# EAGLE board vehicle-interface (EAGLE 6.6.0)
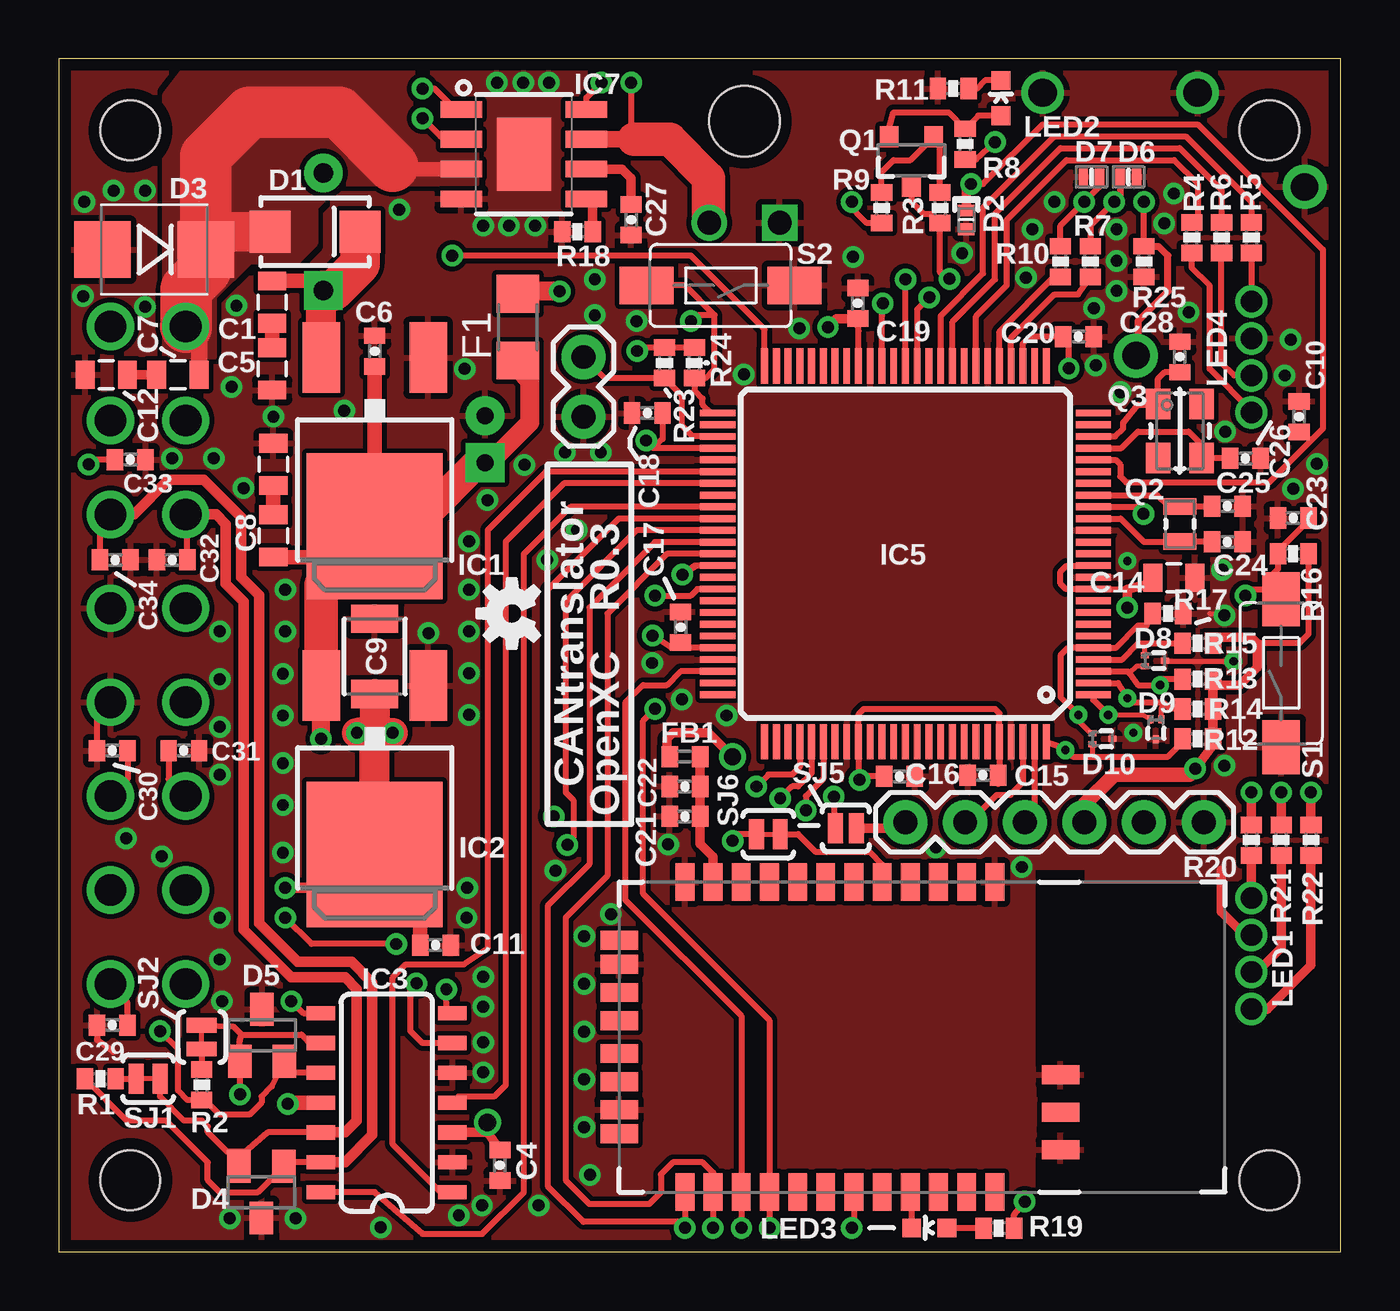
[diagram p0: board, top side]
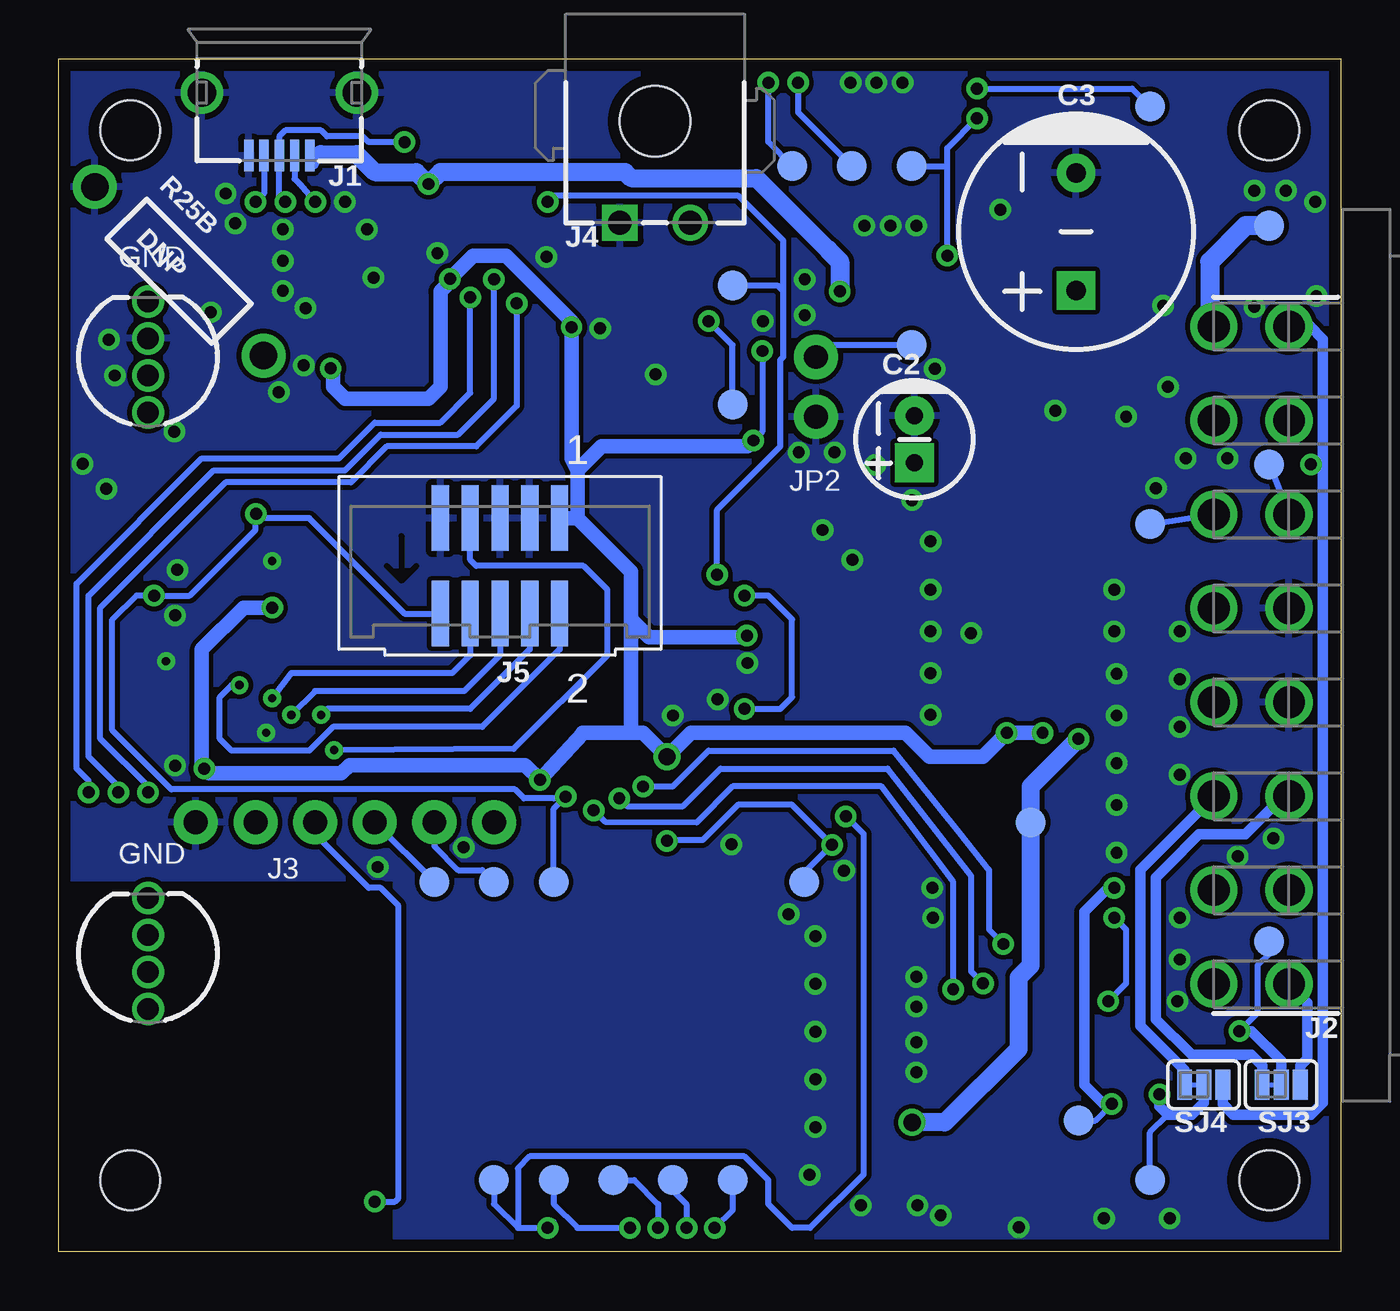
[diagram p1: board, bottom side, seen from below]

Size 54.61 x 50.8 mm. Coordinates in mm from the lower left corner, seen from the top.
Outline: 0,0 54.61,0 54.61,50.8 0,50.8 0,0
Copper layers (1*16): Top 0.0178mm / dielectric 59mil / Bottom 0.0178mm
Design rules "default": minimum track width 8mil, minimum drill 14mil, track to track 8mil, track to pad 8mil, pad to pad 8mil, via to via 8mil, smd to smd 8mil, copper to edge 20mil, drill to drill 16mil, minimum pad ring 8mil, minimum via ring 8mil, stop-mask expansion 3mil, vias tented up to drill 0mil, thermal gap 10mil
Holes 2.54 mm at 51.56,47.75 3.05,47.75 51.56,3.05 3.05,3.05
tRestrict: area 43.7,0.3 to 54.1,14.2; area 43.7,14.2 to 52.1,15.7; area 41.6,8.1 to 43.7,16.3; area 41.7,6.6 to 43.7,6.9; area 41.7,5.1 to 43.7,5.3; area 41.6,0.8 to 43.7,3.7
bRestrict: area 40.4,0.5 to 54.1,15.7; 3 lines

## Footprints (pad centres in the part's own frame; a part is rotated, then mirrored left to right if it is on the bottom)
0805 = smd 0.8 x 1.2: 1 -0.9,0; 2 0.9,0
CPOL-5MMX2D = drill 0.737 pad 1.651 square: 1 -1,0 | drill 0.737 pad 1.651: 2 1,0
CPOL-10MMX5D = drill 0.838 pad 1.651: 1 2.5,0 | drill 0.838 pad 1.651 square: 2 -2.5,0
0402-CAP = smd 0.7 x 0.9: 1 -0.65,0; 2 0.65,0
1210 = smd 1.2 x 2: 1 -1.6,0; 2 1.6,0
SMA-DIODE = smd 1.75 x 1.8: A -1.91,0; C 1.91,0
SOD-882D = smd 0.5 x 0.7: 1 -0.4,0; 2 0.4,0
SMB-DIODE = smd 2.4 x 2.4: A 2.2,0; C -2.2,0
SOT23 = smd 1 x 1.4: 1 -0.95,-1.1; 2 0.95,-1.1; 3 0,1.1
SOD-882 = smd 0.4 x 0.7: 1 -0.35,0; 2 0.35,0
SOT-1123 = smd 0.34 x 0.26: 1 -0.43,0.233; 2 -0.43,-0.233; 3 0.43,0
R1206 = smd 1.6 x 1.803: 1 -1.422,0; 2 1.422,0
C0402 = smd 0.7 x 0.9: 1 -0.65,0; 2 0.65,0
V-REG_DPACK = smd 1.6 x 3: 1 -2.28,-4.8; 3 2.28,-4.8 | smd 5.8 x 6.2: 4 0,2.38
SO14 = smd 0.6 x 1.2: 1 -3.81,-2.8; 2 -2.54,-2.8; 3 -1.27,-2.8; 4 0,-2.8; 5 1.27,-2.8; 6 2.54,-2.8; 7 3.81,-2.8; 8 3.81,2.8; 9 2.54,2.8; 10 1.27,2.8; 11 0,2.8; 12 -1.27,2.8; 13 -2.54,2.8; 14 -3.81,2.8
TQFP100 = smd 1.5 x 0.29: 1 -8,6; 2 -8,5.5; 3 -8,5; 4 -8,4.5; 5 -8,4; 6 -8,3.5; 7 -8,3; 8 -8,2.5; 9 -8,2; 10 -8,1.5; 11 -8,1; 12 -8,0.5; 13 -8,0; 14 -8,-0.5; 15 -8,-1; 16 -8,-1.5; 17 -8,-2; 18 -8,-2.5; 19 -8,-3; 20 -8,-3.5; 21 -8,-4; 22 -8,-4.5; 23 -8,-5; 24 -8,-5.5; 25 -8,-6; 51 8,-6; 52 8,-5.5; 53 8,-5; 54 8,-4.5; 55 8,-4; 56 8,-3.5; 57 8,-3; 58 8,-2.5; 59 8,-2; 60 8,-1.5; 61 8,-1; 62 8,-0.5; 63 8,0; 64 8,0.5; 65 8,1; 66 8,1.5; 67 8,2; 68 8,2.5; 69 8,3; 70 8,3.5; 71 8,4; 72 8,4.5; 73 8,5; 74 8,5.5; 75 8,6 | smd 0.29 x 1.5: 26 -6,-8; 27 -5.5,-8; 28 -5,-8; 29 -4.5,-8; 30 -4,-8; 31 -3.5,-8; 32 -3,-8; 33 -2.5,-8; 34 -2,-8; 35 -1.5,-8; 36 -1,-8; 37 -0.5,-8; 38 0,-8; 39 0.5,-8; 40 1,-8; 41 1.5,-8; 42 2,-8; 43 2.5,-8; 44 3,-8; 45 3.5,-8; 46 4,-8; 47 4.5,-8; 48 5,-8; 49 5.5,-8; 50 6,-8; 76 6,8; 77 5.5,8; 78 5,8; 79 4.5,8; 80 4,8; 81 3.5,8; 82 3,8; 83 2.5,8; 84 2,8; 85 1.5,8; 86 1,8; 87 0.5,8; 88 0,8; 89 -0.5,8; 90 -1,8; 91 -1.5,8; 92 -2,8; 93 -2.5,8; 94 -3,8; 95 -3.5,8; 96 -4,8; 97 -4.5,8; 98 -5,8; 99 -5.5,8; 100 -6,8
RN41 = smd 0.8 x 1.6: 1 -6.6,-6.6; 2 -5.4,-6.6; 3 -4.2,-6.6; 4 -3,-6.6; 5 -1.8,-6.6; 6 -0.6,-6.6; 7 0.6,-6.6; 8 1.8,-6.6; 9 3,-6.6; 10 4.2,-6.6; 11 5.4,-6.6; 12 6.6,-6.6; 13 6.6,6.6; 14 5.4,6.6; 15 4.2,6.6; 16 3,6.6; 17 1.8,6.6; 18 0.6,6.6; 19 -0.6,6.6; 20 -1.8,6.6; 21 -3,6.6; 22 -4.2,6.6; 23 -5.4,6.6; 24 -6.6,6.6 | smd 1.6 x 0.8: 25 -9.4,4.8; 26 -9.4,3.2; 27 -9.4,1.6; 28 9.4,3.1; 29 9.4,-3.1; 30 9.4,-4.122; 31 9.4,-1.9; 32 9.4,-0.7; 33 9.4,0.7; 34 9.4,1.9; 35 9.4,4.122
POWER_SO8 = smd 0.711 x 1.778: 1 -1.905,-2.662; 2 -0.635,-2.662; 3 0.635,-2.662; 4 1.905,-2.662; 5 1.905,2.662; 6 0.635,2.662; 7 -0.635,2.662; 8 -1.905,2.662 | smd 3.1 x 2.3: PAD 0,0
10118193 = smd 0.4 x 1.35: 1 -1.3,2.675; 2 -0.65,2.675; 3 0,2.675; 4 0.65,2.675; 5 1.3,2.675 | drill 1.2: S1 -3.3,0; S2 3.3,0
OBDII-COMTECH = drill 1.346: 1 -14,0; 2 -10,0; 3 -6,0; 4 -2,0; 5 2,0; 6 6,0; 7 10,0; 8 14,0; 9 -14,3.2; 10 -10,3.2; 11 -6,3.2; 12 -2,3.2; 13 2,3.2; 14 6,3.2; 15 10,3.2; 16 14,3.2
1X06 = drill 1.016 pad 1.88: 1 0,0; 2 2.54,0; 3 5.08,0; 4 7.62,0; 5 10.16,0; 6 12.7,0
2-1445055-2 = drill 1.016 square: 1 1.499,2.159 | drill 1.016: 2 -1.499,2.159 | hole 2.997: 0,-2.159
SHF-105-01-X-D-SM = smd 0.737 x 2.794: 1 -2.54,-2.032; 2 -2.54,2.032; 3 -1.27,-2.032; 4 -1.27,2.032; 5 0,-2.032; 6 0,2.032; 7 1.27,-2.032; 8 1.27,2.032; 9 2.54,-2.032; 10 2.54,2.032
1X02 = drill 1.016 pad 1.88: 1 0,0; 2 2.54,0
LED5MM-RGB = drill 0.914 pad 1.346: 1 2.362,0; 2 0.787,0; 3 -0.787,0; 4 -2.362,0
LED-0603 = smd 0.8 x 0.8: A 0,-0.75; C 0,0.75
SOT23-3 = smd 0.8 x 0.9: 1 -0.95,-1; 2 0.95,-1; 3 0,1.1
ST2012SB = smd 0.7 x 1.4: 1 -0.75,0; 2 0.75,0
CX3225SB = smd 1.3 x 1.05: 1 -1.15,-0.925; 2 1.15,-0.925; 3 1.15,0.925; 4 -1.15,0.925
0402-RES = smd 0.7 x 0.9: 1 -0.65,0; 2 0.65,0
AXIAL-0.4 = drill 1.168 pad 1.88: P$1 -5.08,0; P$2 5.08,0
TACTILE-SWITCH-1101NE = smd 2.3 x 1.6: P$1 -3.15,0; P$2 3.15,0
SJ_2S-TRACE = smd 0.635 x 1.27: 1 -0.508,0; 2 0.508,0
SJ_3_PASTE1&2 = smd 0.635 x 1.27: 1 -0.813,0; 2 0,0; 3 0.813,0
SJ_2S-NO = smd 0.635 x 1.27: 1 -0.45,0; 2 0.45,0
PAD.03X.05 = smd 1.27 x 1.27: P$1 0,0

## Placement (x,y rotation side)
C1  0.1u  [0805]  9.09,40.44 270 top
C2  150u  [CPOL-5MMX2D]  18.16,34.59 90 bottom
C3  270u  [CPOL-10MMX5D]  11.28,43.43 90 bottom
C4  22n  [0402-CAP]  18.8,3.68 270 top
C5  0.1u  [0805]  9.09,37.59 270 top
C6  0.1u  [0402-CAP]  13.46,38.35 270 top
C7  0.47u  [0805]  5.08,37.34 180 top
C8  0.1u  [0805]  9.14,30.48 90 top
C9  47u  [1210]  13.46,25.35 90 top
C10  0.1u  [0402-CAP]  52.83,35.56 90 top
C11  22n  [0402-CAP]  16.05,13.06 0 top
C12  0.47u  [0805]  2.03,37.34 180 top
C13  0.1u  [0805]  9.14,33.53 90 top
C14  10u  [0805]  47.5,28.7 0 top
C15  0.1u  [0402-CAP]  39.37,20.29 180 top
C16  0.1u  [0402-CAP]  35.81,20.24 0 top
C17  0.1u  [0402-CAP]  26.49,26.59 90 top
C18  0.1u  [0402-CAP]  25.07,35.71 180 top
C19  0.1u  [0402-CAP]  34.04,40.39 90 top
C20  0.1u  [0402-CAP]  43.43,38.96 0 top
C21  0.1u  [0402-CAP]  26.67,18.54 0 top
C22  1u  [0402-CAP]  26.67,19.81 0 top
C23  0.1u  [0402-CAP]  52.58,31.24 180 top
C24  18p  [0402-CAP]  49.78,30.23 180 top
C25  18p  [0402-CAP]  49.78,31.75 180 top
C26  18p  [0402-CAP]  50.55,33.78 0 top
C27  1u  [0402-CAP]  24.38,43.94 270 top
C28  18p  [0402-CAP]  47.75,38.1 90 top
C29  100p  [0402-CAP]  2.29,9.65 180 top
C30  100p  [0402-CAP]  2.29,21.34 180 top
C31  100p  [0402-CAP]  5.33,21.34 0 top
C32  100p  [0402-CAP]  4.83,29.46 180 top
C33  100p  [0402-CAP]  3.05,33.73 0 top
C34  100p  [0402-CAP]  2.41,29.46 0 top
D1  RS1J  [SMA-DIODE]  10.92,43.43 0 top
D2  PESD12VS1ULD  [SOD-882D]  38.66,43.94 270 top
D3  1SMB16CAT3G  [SMB-DIODE]  4.06,42.67 180 top
D4  PESD1CAN  [SOT23]  8.64,2.54 180 top
D5  PESD1CAN  [SOT23]  8.66,9.22 0 top
D6  PESD5V0X1BL  [SOD-882]  45.57,45.77 180 top
D7  PESD5V0X1BL  [SOD-882]  43.99,45.77 0 top
D8  [SOT-1123]  46.69,25.17 0 top
D9  [SOT-1123]  46.74,22.25 270 top
D10  [SOT-1123]  44.45,21.84 0 top
DRILEGEND  [DRILEGEND]  119.63,27.56 0 top  (outside the outline)
F1  MF-MSMF110/16-2  [R1206]  19.56,39.37 90 top
F2  [OSHW-LOGO-S]  19.3,27.18 90 top
FB1  742843122  [C0402]  26.67,21.08 180 top
IC1  LM340S-50  [V-REG_DPACK]  13.46,33.27 180 top
IC2  TLE4284DV33  [V-REG_DPACK]  13.46,19.3 180 top
IC3  TJA1048T  [SO14]  13.97,6.35 90 top
IC5  LPC1769FBD100  [TQFP100]  36.07,29.72 180 top
IC6  RN41-I/RM  [RN41]  33.27,9.14 180 top
IC7  TPS2421-2  [POWER_SO8]  19.81,46.74 270 top
J1  USB_MINIB_SHIELD-10118193  [10118193]  45.21,49.35 180 bottom
J2  OBDII  [OBDII-COMTECH]  2.21,25.4 90 bottom
J3  ISP  [1X06]  36.07,18.29 0 top
J4  PWR OUT  [2-1445055-2]  29.21,45.97 180 bottom
J5  ARM mini-JTAG  [SHF-105-01-X-D-SM]  35.81,29.21 180 bottom
JP2  ISP_EN  [1X02]  22.35,38.1 270 top
LED1  RGB  [LED5MM-RGB]  50.8,12.7 90 bottom
LED2  SML-LX0603SRW  [LED-0603]  40.13,49.12 0 top
LED3  SML-LX0603SRW  [LED-0603]  37.08,1.02 90 top
LED4  RGB  [LED5MM-RGB]  50.8,38.1 90 bottom
Q1  BC856  [SOT23-3]  36.32,46.48 180 top
Q2  32k  [ST2012SB]  47.75,30.99 270 top
Q3  12M  [CX3225SB]  47.75,34.95 270 top
R1  120  [0402-RES]  1.78,7.37 0 top
R2  120  [0402-RES]  6.1,7.11 270 top
R3  10k  [0402-RES]  37.54,44.45 270 top
R4  17.4  [0402-RES]  48.26,43.18 270 top
R5  143  [0402-RES]  50.8,43.18 270 top
R6  30  [0402-RES]  49.53,43.18 270 top
R7  33E  [0402-RES]  43.94,42.16 90 top
R8  1.5k  [0402-RES]  38.61,47.17 90 top
R9  2k  [0402-RES]  35.05,44.45 270 top
R10  33E  [0402-RES]  42.67,42.16 90 top
R11  560  [0402-RES]  38.1,49.53 0 top
R12  10k  [0402-RES]  48.51,21.84 180 top
R13  10k  [0402-RES]  48.51,24.38 180 top
R14  10k  [0402-RES]  48.51,23.11 180 top
R15  4.7k  [0402-RES]  48.51,25.91 180 top
R16  10k  [0402-RES]  52.58,29.72 0 top
R17  10k  [0402-RES]  47.24,27.18 0 top
R18  49.9k  [0402-RES]  22.1,43.43 180 top
R19  560  [0402-RES]  40.05,1.01 180 top
R20  143  [0402-RES]  50.8,17.53 270 top
R21  30  [0402-RES]  52.07,17.53 270 top
R22  17.4  [0402-RES]  53.34,17.53 270 top
R23  10k  [0402-RES]  25.81,37.85 270 top
R24  10k  [0402-RES]  27.08,37.85 270 top
R25  120  [0402-RES]  46.23,42.16 90 top
R25B  DNP  [AXIAL-0.4]  49.48,41.75 315 bottom
S1  RESET  [TACTILE-SWITCH-1101NE]  52.07,24.64 90 top
S2  PROG  [TACTILE-SWITCH-1101NE]  28.19,41.15 180 top
SJ1  CLOSED  [SJ_2S-TRACE]  3.81,7.37 180 top
SJ2  CLOSED  [SJ_2S-TRACE]  6.1,9.14 90 top
SJ3  [SJ_3_PASTE1&2]  2.54,7.11 0 bottom
SJ4  [SJ_3_PASTE1&2]  5.84,7.11 0 bottom
SJ5  OPEN  [SJ_2S-NO]  33.53,18.03 0 top
SJ6  CLOSED  [SJ_2S-TRACE]  30.23,17.78 0 top
TP1  [PAD.03X.05]  3.05,33.53 0 bottom
TP2  [PAD.03X.05]  8.13,30.99 0 bottom
TP3  [PAD.03X.05]  3.05,13.21 0 bottom
TP4  [PAD.03X.05]  8.13,3.05 0 bottom
TP5  [PAD.03X.05]  3.05,43.69 0 bottom
TP6  [PAD.03X.05]  13.21,18.29 0 bottom
TP7  [PAD.03X.05]  11.18,5.59 0 bottom
TP8  [PAD.03X.05]  25.91,3.05 90 bottom
TP9  [PAD.03X.05]  28.45,3.05 90 bottom
TP10  [PAD.03X.05]  30.99,3.05 90 bottom
TP11  [PAD.03X.05]  33.53,3.05 90 bottom
TP12  [PAD.03X.05]  22.86,15.75 90 bottom
TP13  [PAD.03X.05]  36.07,3.05 90 bottom
TP14  [PAD.03X.05]  18.29,46.23 0 bottom
TP15  [PAD.03X.05]  23.37,46.23 0 bottom
TP16  [PAD.03X.05]  25.91,41.15 0 bottom
TP17  [PAD.03X.05]  18.29,38.61 0 bottom
TP18  [PAD.03X.05]  25.91,36.07 0 bottom
TP19  [PAD.03X.05]  36.07,15.75 90 bottom
TP20  [PAD.03X.05]  38.61,15.75 90 bottom
TP21  [PAD.03X.05]  33.53,15.75 0 bottom
TP22  [PAD.03X.05]  8.13,48.77 0 bottom
TP23  [PAD.03X.05]  20.83,46.23 0 bottom
ZDRAW1  [A4L-LOC]  -55.88,-52.7 0 top  (outside the outline)

## Library data of the parts
C1-C34 D1-D10 FB1 IC3 IC5 IC7 J1 J2 J4 J5 LED1-LED4 Q2 Q3 R1-R25 R25B = BUG
DRILEGEND = drilegend
F1 = adafruit
F2 = SparkFun-Aesthetics
IC1 IC2 = SparkFun-PowerIC
IC6 = SparkFun-RF
J3 JP2 = SparkFun-Connectors
Q1 = SparkFun-DiscreteSemi
S1 S2 = SparkFun-Electromechanical
SJ1-SJ6 TP1-TP23 = SparkFun-Passives
ZDRAW1 = frames

## Nets
3.3V: C9.1 C11.1 C14.1 C15.1 C16.1 C17.1 C18.1 C19.1 C20.1 FB1.2 IC2.4 IC3.11 IC5.10 IC5.12 IC5.28 IC5.42 IC5.54 IC5.71 IC5.84 IC5.96 J3.4 J5.1 Q1.3 R3.2 R12.1 R13.1 R14.1 R15.1 R16.2 R19.1 R23.1 R24.1 TP7.P$1
5V: C2.1 C4.1 C6.2 C8.1 F1.1 IC1.4 IC2.3 IC3.3 TP6.P$1
!BT_RST: IC5.61 SJ6.1 TP12.P$1
!ISP_EN: IC5.53 JP2.1 R23.2 TP17.P$1
!RESET: C23.1 IC5.17 J5.10 R16.1 S1.P$2 SJ5.1 TP21.P$1
!USBBOOT_EN: IC5.51 R24.2 S2.P$2 TP18.P$1
+12V: C7.1 D1.A D3.C IC7.3 J2.16 TP5.P$1
BT_CONN: IC5.60 IC6.19 TP13.P$1
BT_CTS: IC5.66 IC6.16 TP11.P$1
BT_RTS: IC5.73 IC6.15 TP10.P$1
BT_RX: IC5.62 IC6.13 TP8.P$1
BT_TX: IC5.63 IC6.14 TP9.P$1
CANA_EN: IC3.14 IC5.59
CANA_RX: IC3.4 IC5.57
CANA_TX: IC3.1 IC5.56
CANB_EN: IC3.8 IC5.79
CANB_RX: IC3.7 IC5.81
CANB_TX: IC3.6 IC5.80
DEBUG_RX: IC5.99 J3.3 TP20.P$1
DEBUG_TX: IC5.98 J3.2 TP19.P$1
GND: C2.2 C3.1 C4.2 C5.2 C6.1 C9.2 C10.2 C11.2 C12.2 C13.2 C14.2 C15.2 C16.2 C17.2 C18.2 C19.2 C20.2 C21.1 C22.1 C23.2 C24.1 C25.1 C26.2 C27.2 C28.2 C29.2 C30.2 C31.2 C32.2 C33.2 C34.2 D2.2 D3.A D4.3 D5.3 D6.1 D7.1 D8.3 D9.3 D10.3 IC1.1 IC2.1 IC3.2 IC3.5 IC5.11 IC5.15 IC5.31 IC5.41 IC5.55 IC5.72 IC5.83 IC5.97 IC6.1 IC6.12 IC6.25 IC6.27 IC6.28 IC6.29 IC7.4 IC7.PAD J1.5 J1.S1 J1.S2 J2.4 J2.5 J3.6 J4.1 J5.3 J5.5 J5.9 JP2.2 LED1.2 LED4.2 R11.1 R17.2 R18.2 R25.1 R25B.P$1 S1.P$1 S2.P$1
HSPD_HI: C34.1 D4.1 IC3.13 J2.6 R1.1 TP1.P$1
HSPD_LO: C32.1 D4.2 IC3.12 J2.14 SJ1.1 TP2.P$1
MSPD_HI: C30.1 D5.2 IC3.10 J2.3 R2.2 SJ3.1 SJ3.2 TP3.P$1
MSPD_LO: C31.1 D5.1 IC3.9 J2.11 SJ2.2 SJ4.1 SJ4.2 TP4.P$1
MULTI_HI: C29.1 J2.1 SJ3.3
MULTI_LO: C33.1 J2.8 SJ4.3
N$1: R1.2 SJ1.2
N$2: IC5.40 R20.1
N$3: R2.1 SJ2.1
N$4: IC5.50 IC7.2 TP14.P$1
N$5: LED1.4 R22.2
N$6: IC6.21 LED3.C
N$7: C7.2 C12.1
N$8: LED3.A R19.2
N$9: IC5.38 R21.1
N$10: IC5.37 R22.1
N$11: LED1.3 R21.2
N$12: LED1.1 R20.2
N$13: IC7.5 R18.1
N$14: C27.1 IC7.6
N$15: LED4.4 R4.2
N$16: IC5.32 R4.1
N$17: C25.2 IC5.18 Q2.1
N$18: C8.2 C13.1
N$19: J1.4 R25.2 R25B.P$2
N$20: D7.2 J1.2 R10.2
N$21: C1.2 C5.1
N$22: C1.1 C3.2 D1.C IC1.3
N$23: C24.2 IC5.16 Q2.2
N$24: D6.2 J1.3 R7.2 R8.1
N$25: C26.1 IC5.22 Q3.3
N$26: C28.1 IC5.23 Q3.1
N$27: LED2.A Q1.2 R8.2
N$28: LED2.C R11.2
N$29: Q1.1 R3.1 R9.1
N$30: LED4.3 R6.2
N$31: LED4.1 R5.2
N$32: IC5.34 R6.1
N$33: IC5.35 R5.1
N$34: IC7.1 TP22.P$1
N$35: IC7.8 TP23.P$1
N$36: J3.1 SJ5.2
N$37: IC6.5 SJ6.2
N$38: C21.2 C22.2 FB1.1 IC6.11
RTCK: D10.2 IC5.100 J5.7 R12.2
TCK: D10.1 IC5.5 J5.4 R17.1
TDI: D9.1 IC5.2 J5.8 R14.2
TDO: D9.2 IC5.1 J5.6
TMS: D8.2 IC5.3 J5.2 R13.2
TRST: D8.1 IC5.4 R15.2
USB_CON: IC5.64 R9.2 TP16.P$1
USB_D+: IC5.29 R7.1
USB_D-: IC5.30 R10.1
USB_VBUS: C10.1 D2.1 F1.2 IC5.21 J1.1
VOUT: IC7.7 J4.2 TP15.P$1

## Tracks (layer width: path | path; a pad name or v marks a point on that pad's centre or on a via)
3.3V  (via drill 0.51, 0.74)
  Top 0.254: IC5.42 34.07,39.2 C19.1 34.04,39.37 | 46.34,28.45 45.52,28.22 45.24,28.22 IC5.10 42.9,28.22 42.67,28.45 42.67,28.96 42.93,29.21 IC5.12 | 49.28,21.73 R12.1 | IC5.28 41.07,38.66 41.4,38.99 42.73,38.99 C20.1 43.02,38.61 v43.03,37.62 | 35.38,19.99 C16.1 34.11,20.24 v34.11,20.09 34.07,20.29 IC5.84 34.07,22.89 34.29,23.11 39.88,23.11 40.07,22.92 IC5.96 40.07,20.3 C15.1 40.02,19.92 | Q1.3 36.32,44.7 36.83,44.2 37.08,44.2 | 37.08,44.2 37.2,44.2 R3.2 37.54,41.71 37.82,41.43 v37.95,41.43 | 37.08,44.2 37.34,43.94 37.34,43.69 | R19.1 40.7,1.58 v41.15,2.13 | R16.2 53.23,26.3 52.83,25.91 51.05,25.91 | C17.1 26.72,25.72 IC5.71 26.1,25.72 v25.3,26.24 | R24.1 R23.1 24.78,38.5 v24.64,38.35 | IC5.54 25.34,34.22 | 25.34,34.22 v25.02,34.54 | C18.1 25.72,34.61 25.33,34.22 25.34,34.22 | IC3.11 9.8,6.35 v9.75,6.3
  Top 0.406: R12.1 R14.1 R13.1 49.42,24.13 50.29,24.13 51.05,24.89 51.05,25.91 50.8,26.16 49.42,26.16 R15.1 | C14.1 46.6,28.56 46.48,28.45 45.52,28.22 v45.52,27.43 | 49.28,21.73 49.28,21.69 49.17,21.59 v48.41,20.57 | C19.1 33.13,39.74 v32.77,39.37 | v28.7,21.08 27.69,22.1 26.16,22.1 25.91,21.84 25.91,21.19 FB1.2
  Top 0.457: v9.65,15.49 11.18,15.49 11.27,15.4 11.94,15.4
  Top 0.61: IC3.11 9.65,6.35 9.73,6.3 | J3.4 43.69,19.05 44.96,20.32 48.16,20.32 v48.41,20.57 | 11.94,15.4 IC2.4 15.4,14.98 C11.1
  Top 1.27: C9.1 13.46,22.1 | IC2.4 13.46,22.1 | 13.46,22.1 v14.22,22.1 | 13.46,22.1 v12.7,22.1
  Bottom 0.254: v41.15,2.13 40.28,2.13 40.13,2.29 40.13,14.73 40.89,15.49 41.4,15.49 43.69,17.78 J3.4 | v24.64,38.35 24.64,34.92 v25.02,34.54 | TP7.P$1 10.46,5.59 v9.75,6.3
  Bottom 0.457: v9.75,6.3 10.11,6.3 10.92,7.11 10.92,14.48 9.91,15.49 v9.65,15.49
  Bottom 0.61: J5.1 32.51,31.24 | 32.51,31.24 30.23,28.96 30.23,26.92 | 30.23,26.92 30.23,22.1 | 30.23,22.1 32.29,22.1 32.29,22.06 v34.11,20.09 34.75,20.73 42.22,20.73 42.57,20.37 48.21,20.37 v48.41,20.57 48.51,20.57 48.51,25.65 46.74,27.43 v45.52,27.43 | 32.51,31.24 32.51,33.27 | 32.51,33.27 31.5,34.29 25.27,34.29 v25.02,34.54 | 32.51,33.27 32.77,33.78 v32.77,39.37 32.77,39.62 35.56,42.42 36.96,42.42 v37.95,41.43 37.95,41.3 38.35,40.89 38.35,36.83 38.86,36.32 42.42,36.32 42.93,36.83 42.93,37.52 v43.03,37.62 | 30.23,26.92 29.46,26.16 25.38,26.16 v25.3,26.24 | 30.23,22.1 29.72,22.1 v28.7,21.08 27.69,22.1 18.54,22.1 17.53,21.08 15.24,21.08 v14.22,22.1 v12.7,22.1
5V  (via drill 0.51, 0.74)
  Top 0.406: IC3.3 18.27,5.08 C4.1 18.27,5.09 18.29,5.08 18.26,5.05 v18.26,5.51
  Top 0.61: C8.1 12.24,29.58 12.44,29.67 IC1.4 | C6.2 IC1.4 | 13.46,28.86 IC1.4
  Top 0.762: v11.18,21.84 IC2.3
  Top 0.813: F1.1 19.56,37.59 20.07,37.08 20.07,35.31 18.36,33.59 C2.1
  Top 1.27: C2.1 17.85,33.59 15.49,31.24 15.49,30.39 IC1.4
  Top 1.422: IC2.3 11.18,28.41 12.44,29.67
  Bottom 0.762: v18.26,5.51 16.87,5.51 13.72,8.64 13.72,11.68 13.21,12.19 TP6.P$1 13.21,19.81 v11.18,21.84
  Bottom 0.813: 18.09,33.53 C2.1
!BT_RST  (via drill 0.51)
  Top 0.254: IC5.61 24.62,30.72 21.59,27.69 21.59,19.56 21.92,19.23 21.92,17.63 v21.67,17.32 | SJ6.1 28.96,17.78 v28.7,17.5
  Bottom 0.254: 21.84,17.53 v21.67,17.32 | v21.67,17.32 23.39,19.05 25.65,19.05 27.18,17.53 28.7,17.53 v28.7,17.5 | 22.86,16.13 v21.67,17.32
  Bottom 0.406: 22.86,16.13 TP12.P$1
!ISP_EN
  Top 0.254: IC5.53 27,34.72 26.54,35.18 26.54,36.46 R23.2 23.26,37.2 JP2.1
  Bottom 0.254: TP17.P$1 21.84,38.61 JP2.1
!RESET  (via drill 0.51)
  Top 0.254: C23.1 53.23,31.13 51.93,29.83 R16.1 51.93,29.07 51.56,28.7 52.07,28.19 | 46.01,31.72 v46.2,31.42 45.9,31.72 IC5.17 | SJ5.1 v33.02,19.38 | v50.55,27.94 50.79,28.18 51.93,28.18 51.94,28.19 52.07,28.19 | S1.P$2 52.07,28.19
  Bottom 0.254: J5.10 39.88,27.18 43.94,31.24 45.97,31.24 v46.2,31.42 46.23,31.39 46.23,30.73 49.02,27.94 v50.55,27.94 51.31,27.94 52.32,26.92 52.32,22.2 49.81,19.68 35.18,19.68 34.8,19.3 33.53,19.3 33.2,19.38 v33.02,19.38 33.53,18.87 TP21.P$1
!USBBOOT_EN  (via drill 0.51)
  Top 0.254: IC5.51 27.78,35.72 27.43,36.07 27.43,36.32 27.08,36.68 R24.2 27.54,37.2 27.94,37.59 27.94,39.88 | 27.94,39.88 26.67,41.15 S2.P$2 | 27.94,39.88 27.18,39.88 v26.92,39.62
  Bottom 0.254: TP18.P$1 25.91,38.61 v26.92,39.62
+12V
  Top 0.61: IC7.3 14.35,46.1 14.22,46.23
  Top 0.711: C7.1 5.98,38.83 5.44,39.37
  Top 1.676: D1.A 6.52,43.43 6.26,43.18
  Top 2.184: 14.22,46.23 11.94,48.51 8.13,48.51 6.26,46.65 6.26,43.18 D3.C 6.26,41.82 5.44,41 5.44,39.37 J2.16
  Bottom 0.813: TP5.P$1 4.06,43.69 5.59,42.16 5.59,39.58 J2.16
  Bottom 1.067: 5.44,39.37 J2.16
  pour Top (rank 2, no thermals): 4.55,38.1 4.55,49.28 5.33,50.29 16.76,50.29 17.78,49.28 17.78,45.47 11.94,45.47 10.92,44.45 10.92,42.93 10.16,42.16 8.13,42.16 6.6,40.64 6.6,38.1
BT_CONN  (via drill 0.51)
  Top 0.254: IC5.60 23.85,31.22 20.83,28.19 20.83,18.8 v21.08,18.54 | IC6.19 33.87,1.11 v33.78,1.02
  Bottom 0.254: v21.08,18.54 20.32,17.78 20.32,3.3 22.61,1.02 23.37,1.02 24.38,2.03 24.38,3.05 25.4,4.06 34.54,4.06 35.05,3.56 35.05,1.02 | 33.53,1.27 v33.78,1.02 35.05,1.02 | TP13.P$1 36.07,2.03 35.05,1.02
BT_CTS  (via drill 0.51)
  Top 0.254: IC5.66 27.2,28.22 26.92,27.94 v25.4,27.94 | v25.4,23.11 24.89,22.61 24.89,15.24 30.27,9.86 IC6.16 30.27,1.22 v30.28,1.02
  Bottom 0.254: v25.4,23.11 23.88,23.11 23.37,23.62 23.37,26.92 24.38,27.94 v25.4,27.94 | TP11.P$1 33.53,2.03 32.51,1.02 v30.28,1.02
BT_RTS  (via drill 0.51)
  Top 0.254: IC5.73 26.5,24.72 25.91,24.13 24.89,24.13 24.13,23.37 24.13,14.99 29.07,10.04 IC6.15 29.07,1.13 v29.08,1.02
  Bottom 0.254: TP10.P$1 30.09,3.05 29.07,2.03 v29.07,1.02 v29.08,1.02
BT_RX  (via drill 0.51)
  Top 0.254: IC5.62 25.39,30.22 22.61,27.43 22.61,16.51 20.83,14.73 20.83,2.79 22.35,1.27 26.42,1.27 v26.67,1.02 26.67,1.27 IC6.13
  Bottom 0.254: TP8.P$1 25.91,1.78 v26.67,1.02
BT_TX  (via drill 0.51)
  Top 0.254: IC5.63 25.91,29.72 23.37,27.18 23.37,16 21.59,14.22 21.59,3.05 22.61,2.03 25.15,2.03 25.65,2.54 25.65,3.3 26.16,3.81 27.43,3.81 27.87,3.37 IC6.14 27.87,1.08 v27.86,1.02
  Bottom 0.254: TP9.P$1 28.45,2.61 27.87,2.03 27.87,1.03 v27.86,1.02
CANA_EN
  Top 0.254: IC5.59 21.81,31.72 19.81,29.72 19.81,2.54 18.03,0.76 15.49,0.76 13.46,2.54 IC3.14
CANA_RX
  Top 0.254: IC5.57 21.52,32.72 19.05,30.25 19.05,7.11 18.54,6.6 17.02,6.6 IC3.4
CANA_TX
  Top 0.254: IC3.1 16.26,2.54 14.22,4.57 14.22,11.68 14.78,12.24 17.25,12.24 18.29,12.95 18.29,30.73 20.75,33.22 | IC5.56 20.76,33.22 20.75,33.22 | 20.75,33.22 20.78,33.22
CANB_EN  (via drill 0.51)
  Top 0.254: IC5.79 31.57,20.65 31.24,20.32 30.23,20.32 v29.72,19.81 | v9.65,14.22 10.77,13.11 v14.38,13.11 | v9.91,10.67 10.41,10.16 IC3.8
  Bottom 0.254: v29.72,19.81 28.45,19.81 26.92,21.34 19.05,21.34 16.27,17.87 14.99,16.26 14.99,13.72 v14.38,13.11 | v9.91,10.67 9.14,11.43 9.14,13.72 v9.65,14.22
CANB_RX  (via drill 0.51)
  Top 0.254: IC5.81 32.57,20.15 31.83,19.41 v31.83,18.8 | IC3.7 16.52,10.17 v16.51,11.18
  Bottom 0.254: v31.83,18.8 31.34,18.31 27.43,18.29 25.91,19.81 19.56,19.81 16.51,15.75 v16.51,11.18
CANB_TX  (via drill 0.51)
  Top 0.254: IC3.6 15.49,8.89 14.99,9.4 14.99,11.18 v15.24,11.43 | IC5.80 32.07,20.38 31.5,19.81 31.24,19.81 v30.73,19.3
  Bottom 0.254: v30.73,19.3 30.4,18.97 28.02,18.97 26.42,20.57 19.3,20.57 15.75,16 15.75,11.94 v15.24,11.43
DEBUG_RX
  Top 0.254: IC5.99 41.57,18.71 J3.3
  Bottom 0.254: J3.3 TP20.P$1
DEBUG_TX
  Top 0.254: J3.2 38.79,18.29 39.95,19.46 40.54,19.46 41.07,19.99 IC5.98
  Bottom 0.254: J3.2 38.61,17.27 37.59,16.26 36.58,16.26 TP19.P$1
GND  (via drill 0.36, 0.51)
  Top 0.203: D8.3 47.27,25.15 v50.04,25.15 | 49.02,27.18 49.58,27.18 v49.66,27.1
  Top 0.254: C29.2 1.64,9.03 2.34,8.51 | C30.2 1.64,22.83 J2.4
  Top 0.406: LED1.2 50.52,13.49 49.53,14.48 49.53,16.26 | 1.13,42.7 D3.A
  other vias: 1.09,44.7 18.08,7.65 7.29,1.42 28.45,22.83 25.27,25.07 44.17,37.74 52.22,37.31 45.52,29.41 37.36,17.22 14.5,44.37 17.3,37.59 17.48,30.25 9.65,28.19 13.72,1.04 20.88,49.78 19.79,49.78 18.67,49.78 23.09,34.04 19.84,33.5 29.18,37.36 6.86,22.35 7.37,36.83 41.02,16.38 12.17,35.81 18.26,32 21.56,34.04 48.13,40.01 47.5,45.06 47.09,43.79 45.06,43.54 45.06,42.19 44.09,40.18 41.2,41.48 41.48,43.54 42.42,44.7 9.14,35.56 45.06,40.92 33.83,42.37 31.55,39.32 2.34,45.19 3.68,45.19 3.68,40.23 7.57,40.28 49.66,20.7 18.03,1.98 20.45,1.98 21.16,16.23 23.52,14.38 18.08,11.71 22.38,7.34 22.38,9.37 22.38,11.4 22.38,13.44 22.38,5.31 22.63,3.28 18.08,10.44 18.08,8.92 17.48,22.86 17.48,24.64 17.48,26.42 17.48,28.19 17.37,14.22 17.4,15.49 26.54,23.52 25.96,17.35 20.8,29.46 22.07,30.73 6.86,20.32 6.86,24.38 18.08,43.69 20.29,43.69 19.18,43.69 53.59,33.55 49.68,34.92 52.58,32.49 9.65,26.42 9.55,24.61 9.55,22.83 9.55,20.8 9.55,19.02 9.55,16.99 7.87,32.51 6.6,33.78 6.86,26.42 6.86,14.22 6.86,12.45 4.39,16.84 49.56,29.03 15.75,26.34 6.96,10.67 2.87,17.6 17.04,1.55 10.08,1.42 4.83,33.78 24.61,39.62 22.83,39.88 22.83,41.4 1.04,40.69 45.24,36.6 52.48,38.84 38.48,42.52 45.77,22.1
  pour Top (rank 4): 0.51,0.51 54.1,0.51 54.1,50.29 0.51,50.29
  pour Bottom: 0.51,0.51 54.1,0.51 54.1,50.29 0.51,50.29
HSPD_HI
  Top 0.254: IC3.13 9.76,3.81 D4.1 8.49,2.54 6.86,2.54 6.35,3.05 6.35,3.81 4.57,5.59 2.91,5.59 R1.1 | C34.1 1.76,30.95 J2.6
  Top 0.457: J2.6 3.21,31.4 4.67,32.87 6.17,32.87 7.77,31.27 7.77,28.73 8.53,27.96 8.53,13.99 10.19,12.34 12.47,12.34 13.36,11.46 13.36,4.98 12.19,3.81 IC3.13
  Bottom 0.254: TP1.P$1 J2.6
HSPD_LO
  Top 0.254: D4.2 7.94,4.25 | 7.94,4.25 8.89,5.08 IC3.12 | 4.27,7.88 SJ1.1 4.32,7.31 4.32,6.6 5.33,5.59 6.1,5.59 6.35,5.33 6.35,5.08 7.18,4.25 7.94,4.25 | C32.1 5.48,31.33 J2.14
  Top 0.457: J2.14 6.7,31.4 7.11,30.99 7.11,28.45 7.87,27.69 7.87,13.72 9.91,11.68 12.19,11.68 12.7,11.18 12.7,5.59 12.19,5.08 IC3.12
  Bottom 0.254: TP2.P$1 J2.14
MSPD_HI  (via drill 0.51)
  Top 0.254: C30.1 2.94,20.13 J2.3 | 6.24,6.35 R2.2 | IC3.10 9.76,7.62 D5.2 9.08,7.05 8.64,6.6 8.64,6.35 8.13,5.84 6.86,5.84 6.24,6.46 R2.2 | R2.2 5.48,6.46 5.08,6.86 5.08,8.64 v4.32,9.4
  Bottom 0.203: SJ3.1 SJ3.2
  Bottom 0.254: v4.32,9.4 3.56,10.16 3.56,12.19 3.05,12.7 TP3.P$1
  Bottom 0.457: J2.3 2.44,19.4 4.06,17.78 6.04,17.78 7.39,16.41 7.87,15.93 7.87,9.91 6.35,8.38 3.81,8.38 3.35,7.92 SJ3.1 | SJ3.2 2.54,8.13 3.81,9.4 v4.32,9.4
MSPD_LO  (via drill 0.51)
  Top 0.254: C31.1 4.68,20.13 J2.11 | 7.8,9.25 7.71,8.98 D5.1 7.71,6.95 v7.72,6.71 | 7.8,9.25 10.34,9.25 10.67,8.89 IC3.9 | SJ2.2 7.42,9.59 7.8,9.25
  Bottom 0.203: SJ4.1 SJ4.2
  Bottom 0.254: TP4.P$1 8.13,5.08 7.37,5.84
  Bottom 0.457: J2.11 8.53,16.27 8.53,9.63 6.66,7.75 SJ4.1 | SJ4.2 5.84,6.35 6.35,5.84 7.37,5.84 7.72,6.2 v7.72,6.71
MULTI_HI
  Top 0.254: C29.1 2.94,10.6 J2.1
  Bottom 0.457: SJ3.3 1.73,7.92 1.42,8.23 1.42,10.61 J2.1
MULTI_LO  (via drill 0.51)
  Top 0.254: C33.1 1.47,33.73 v1.27,33.53
  Bottom 0.254: v1.27,33.53 1.02,33.53 0.76,33.27
  Bottom 0.457: J2.8 1.3,39.4 0.76,38.86 0.76,33.27 0.76,6.35 1.27,5.84 4.57,5.84 5.03,6.3 SJ4.3
N$1
  Top 0.254: R1.2 SJ1.2
N$2  (via drill 0.51)
  Top 0.254: IC5.40 35.07,39.86 v35.1,40.39
  Top 0.406: R20.1 v50.8,19.56
  Bottom 0.254: 50.8,19.81 52.83,21.84 52.83,27.43 47.5,32.77 42.16,32.77 40.64,34.29 36.83,34.29 35.1,36.02 v35.1,40.39
  Bottom 0.406: v50.8,19.56 50.8,19.81
N$3
  Top 0.254: SJ2.1 R2.1
N$4  (via drill 0.51)
  Top 0.254: IC7.2 16.64,47.37 16.26,47.5 v15.49,48.26 | IC5.50 30.07,39.27 26.92,42.42 v16.76,42.42
  Bottom 0.254: v16.76,42.42 16.76,46.23 | 16.76,46.23 16.76,46.99 v15.49,48.26 | TP14.P$1 16.76,46.23
N$5
  Top 0.406: LED1.4 51.49,10.34 53.34,12.19 R22.2
N$6
  Top 0.254: IC6.21 36.32,2.08 LED3.C
N$7
  Top 0.406: C7.2 C12.1
N$8
  Top 0.254: R19.2 37.84,1.01 LED3.A
N$9  (via drill 0.51)
  Top 0.254: IC5.38 v36.07,41.4
  Top 0.406: R21.1 v52.07,19.56
  Bottom 0.254: v52.07,19.56 52.07,19.81 53.34,21.08 53.34,27.94 48.01,33.27 42.42,33.27 40.89,34.8 37.59,34.8 36.07,36.32 v36.07,41.4
N$10  (via drill 0.51)
  Top 0.254: IC5.37 36.57,40.12 v37.08,40.64
  Top 0.406: R22.1 v53.34,19.56
  Bottom 0.254: v53.34,19.56 53.34,20.07 53.85,20.57 53.85,28.45 48.51,33.78 42.67,33.78 41.15,35.31 38.35,35.31 37.08,36.58 v37.08,40.64
N$11
  Top 0.406: LED1.3 51.03,11.91 52.07,12.95 R21.2
N$12
  Top 0.406: R20.2 LED1.1
N$13
  Top 0.406: R18.1 22.75,44.81 IC7.5
N$14
  Top 0.406: IC7.6 24,46.1 24.38,45.72 C27.1
N$15
  Top 0.254: LED4.4 50.8,35.81 49.02,37.59 49.02,41.15 48.26,41.91 R4.2
N$16
  Top 0.254: IC5.32 39.07,39.83 40.39,41.15 40.39,43.94 42.93,46.48 47.5,46.48 48.51,45.47 48.51,44.08 R4.1
N$17
  Top 0.254: IC5.18 46.78,32.22 47.26,31.74 Q2.1 49.12,31.74 C25.2
N$18
  Top 0.61: C13.1 C8.2
N$19  (via drill 0.51)
  Top 0.254: R25.2 v46.23,44.7
  Top 0.305: R25.2 46.85,42.81 47.24,42.42 47.24,40.89 45.97,39.62 45.97,38.25 R25B.P$2
  Bottom 0.254: J1.4 45.86,45.07 v46.23,44.7
N$20  (via drill 0.51)
  Top 0.254: R10.2 42.67,43.69 v43.68,44.7 44.34,45.37 D7.2
  Bottom 0.254: v43.68,44.7 v43.69,44.7 44.35,45.47 44.56,45.68 J1.2
N$21
  Top 0.61: C5.1 C1.2
N$22
  Top 0.61: C1.1 10.88,41.34 C3.2
  Top 1.27: IC1.3 11.18,40.84 C3.2
  Top 1.676: D1.C 12.83,42.04 11.68,40.89 11.64,40.93 C3.2
N$23
  Top 0.254: 47.5,30.23 48.25,30.23 Q2.2 | C24.2 48.27,30.23 Q2.2 | IC5.16 45.24,31.22 46.23,30.23 47.74,30.23 Q2.2
N$24  (via drill 0.51)
  Top 0.254: R8.1 39.08,46.52 v39.88,47.24 | R7.2 43.94,43.69 v44.96,44.7 45.21,44.96 45.21,45.21 45.22,45.22 D6.2
  Bottom 0.254: v44.96,44.7 45.21,44.96 J1.3 45.21,47.5 44.96,47.75 43.43,47.75 43.18,47.5 41.66,47.5 41.4,47.24 v39.88,47.24
N$25
  Top 0.254: IC5.22 45.27,34.22 45.97,34.92 48.13,34.92 48.68,34.38 Q3.3 48.7,33.78 C26.1
N$26
  Top 0.254: IC5.23 45.01,34.72 45.34,35.05 45.34,35.31 45.97,36.07 46.74,36.07 46.77,36.1 Q3.1 46.83,37.17 47.1,37.45 C28.1
N$27
  Top 0.254: Q1.2 35.37,47.82 35.56,48.51 37.91,48.51 R8.2 39.16,48.37 LED2.A
N$28
  Top 0.254: R11.2 39.12,49.53 39.46,49.87 LED2.C
N$29
  Top 0.254: R3.1 37.54,47.16 Q1.1 36.27,46.48 35.56,46.48 35.05,45.97 R9.1
N$30
  Top 0.254: LED4.3 50.06,37.31 49.53,37.85 R6.2
N$31
  Top 0.254: R5.2 LED4.1
N$32
  Top 0.254: IC5.34 38.07,39.59 39.88,41.4 39.88,44.2 42.67,46.99 47.75,46.99 49.53,45.21 R6.1
N$33
  Top 0.254: IC5.35 37.57,39.85 39.37,41.66 39.37,44.45 42.42,47.5 48.01,47.5 50.8,44.7 R5.1
N$34  (via drill 0.51)
  Top 0.254: IC7.1 16.89,48.64 16,49.53 v15.49,49.53
  Bottom 0.254: v15.49,49.53 8.89,49.53 TP22.P$1
N$35  (via drill 0.51)
  Top 0.254: IC7.8 22.47,49.14 v23.11,49.78
  Bottom 0.254: v23.11,49.78 23.11,48.51 TP23.P$1
N$36
  Top 0.406: SJ5.2 35.81,18.03 J3.1
N$37
  Top 0.254: IC6.5 35.07,16.49 34.54,17.02 32.26,17.02 31.5,17.78 SJ6.2
N$38
  Top 0.406: IC6.11 27.87,16.83 27.32,17.38 C21.2 C22.2 FB1.1
RTCK  (via drill 0.36)
  Top 0.203: D10.2 44.02,21.16 43.94,21.08
  Top 0.254: IC5.100 42.8,21.46 v42.88,21.36 43.2,21.08 43.94,21.08 47.24,21.08 48.01,21.84 R12.2
  Bottom 0.254: v42.88,21.36 35.23,21.41 31.24,25.4 31.24,28.19 32.26,29.21 36.83,29.21 37.08,29.46 J5.7
TCK  (via drill 0.36)
  Top 0.203: v43.43,22.86 43.43,22.61 43.97,22.07 D10.1
  Top 0.254: v43.43,22.86 42.67,23.62 42.67,25.4 42.99,25.72 IC5.5 45.02,25.72 45.97,26.67 46.34,26.67 R17.1
  Bottom 0.254: J5.4 34.54,25.65 37.08,23.11 43.18,23.11 v43.43,22.86
TDI  (via drill 0.36)
  Top 0.203: D9.1 46.97,23.17 47.07,23.37
  Top 0.254: IC5.2 45.12,24.22 v45.52,23.57 45.72,23.37 47.07,23.37 47.32,23.11 R14.2
  Bottom 0.254: J5.8 37.08,25.4 37.85,24.64 44.7,24.64 v45.52,23.57
TDO  (via drill 0.36)
  Top 0.203: 46.48,22.61 46.51,22.58 D9.2 46.17,22.86 v44.7,22.86
  Top 0.254: IC5.1 44.07,23.5 v44.7,22.86
  Bottom 0.254: J5.6 35.81,25.4 37.34,23.88 43.69,23.88 v44.7,22.86
TMS  (via drill 0.36)
  Top 0.203: D8.2 45.92,24.94 45.61,24.63
  Top 0.254: IC5.3 45.55,24.72 45.61,24.63 45.97,24.13 v46.91,24.13 46.97,24.38 R13.2 48.01,24.38
  Bottom 0.254: J5.2 33.27,25.65 36.58,22.35 42.93,22.35 43.94,21.34 47.24,21.34 47.75,21.84 47.75,23.62 47.24,24.13 v46.91,24.13
TRST
  Top 0.203: D8.1 46.26,25.88 46.23,25.91
  Top 0.254: IC5.4 45.28,25.22 45.97,25.91 46.23,25.91 R15.2
USB_CON  (via drill 0.51)
  Top 0.254: v33.78,44.7 33.53,44.7 34.43,43.8 R9.2 | IC5.64 27.19,29.22 v26.57,28.83 27.08,29.22 IC5.64
  Bottom 0.254: 23.75,40.89 23.75,38.1 23.88,37.97 23.88,34.29 26.57,31.6 v26.57,28.83 26.7,28.96 | 23.75,40.89 23.75,43.05 25.65,44.96 33.53,44.96 v33.78,44.7 | TP16.P$1 24,41.15 23.75,40.89
USB_D+
  Top 0.254: IC5.29 40.57,38.92 42.42,40.77 43.42,40.77 R7.1
USB_D-
  Top 0.254: IC5.30 40.07,39.18 42.42,41.53 42.56,41.53 R10.1
USB_VBUS  (via drill 0.51)
  Top 0.254: IC5.21 45.02,33.72 45.21,33.53 45.21,33.02 45.47,32.77 51.56,32.77 53.34,34.54 | v38.86,45.47 39.37,45.47 41.91,48.01 48.51,48.01 53.85,42.67 53.85,35.05 53.34,34.54 | C10.1 52.97,34.91 53.34,34.54
  Top 0.406: D2.1 38.66,45.26 v38.86,45.47
  Top 0.813: v21.34,40.89 19.66,40.89 F1.2
  Bottom 0.254: 43.43,46.74 43.69,46.23 43.69,46.74 43.85,46.74 J1.1
  Bottom 0.762: 43.43,46.74 41.91,46.74 41.15,45.97 39.37,45.97 v38.86,45.47 38.35,45.97 30.48,45.97 30.23,45.72 24.89,45.72 21.84,42.67
  Bottom 0.813: 21.84,42.67 21.34,42.16 v21.34,40.89
VOUT  (via drill 0.51)
  Top 0.254: v24.38,49.78 24.38,47.37
  Top 0.711: IC7.7 24.38,47.37 24.51,47.37
  Top 1.422: 24.51,47.37 26.04,47.37 27.69,45.72 27.69,43.84 J4.2
  Bottom 0.254: TP15.P$1 24.38,47.24 v24.38,49.78

## Text on the board
tPlace: R0.3 | CANtranslator | OpenXC
bNames: GND | JP2 | GND | J3
Document: NOTES: | 1. All dimensions are in Inches unless otherwise specified | 2. Finished board thickness 0.061 inches +/- 0.006" | 3. PCB Construction: Std. 2-layer stackup, 0.5oz CU | 4. Soldermask over bare copper, both sides | 5. Silkscreen on TOP side only, clip from solder lands | 6. Minimum Conductor Width/Spacing: 8mil | 7. PCB Material: FR-4 or equivalent | 8. Files are in Gerber 274X format | 9. Finished PCB Warpage and Twist per IPC-6012 | 10. Layer to layer registration variation +/- 0.005" | 11. Hole size variation +/- 0.004" of the finished drill size | 12. Board outline variation +/- 0.010" of board outline layer | 13. Remove all burrs if present | 14. All through hole components installed on bottom side | 15. Solder on shield of J1 (USB Micro) must not be | wicked into the path of the connector | 16. Ensure J1 (USB Micro) is soldered flush to the PCB | 17. LED1+LED4 must be bent 90 degrees towards edge of PCB, overhang ok | 18. Electrolytic caps to be soldered flush on PCB - no exposed leads | Revision 0.3 | Bug Labs INC. | www.buglabs.net | ENGR: Andrew Tergis | andrew.tergis@buglabs.net
Reference: DC Power Out | USB | USB LED | Front Panel LEDS | OBD-II Right-Angle Connector | BT LED
tAssy: D7 | D6 | D2 | F1 | C10 | C13 | C9 | D8 | D9 | FB1 | D10 | C22 | SJ6 | IC6
bAssy: TP22 | J1 | TP14 | TP23 | TP15 | J4 | C3 | TP5 | TP16 | R25B | TP17\ | LED4 | TP18 | C2 | TP1 | TP2 | J5 | J2 | TP6 | J3 | TP12 | TP21 | TP19 | TP20 | TP3 | LED1 | SJ3 | SJ4 | TP7 | TP4 | TP8 | TP9 | TP10 | TP11 | TP13
DrillLegend: LAYER-STACK
DrillLegend_01-16: 01-16
DrillLegend_01-20: 01-20